# EAGLE board G888a (EAGLE 4.11)
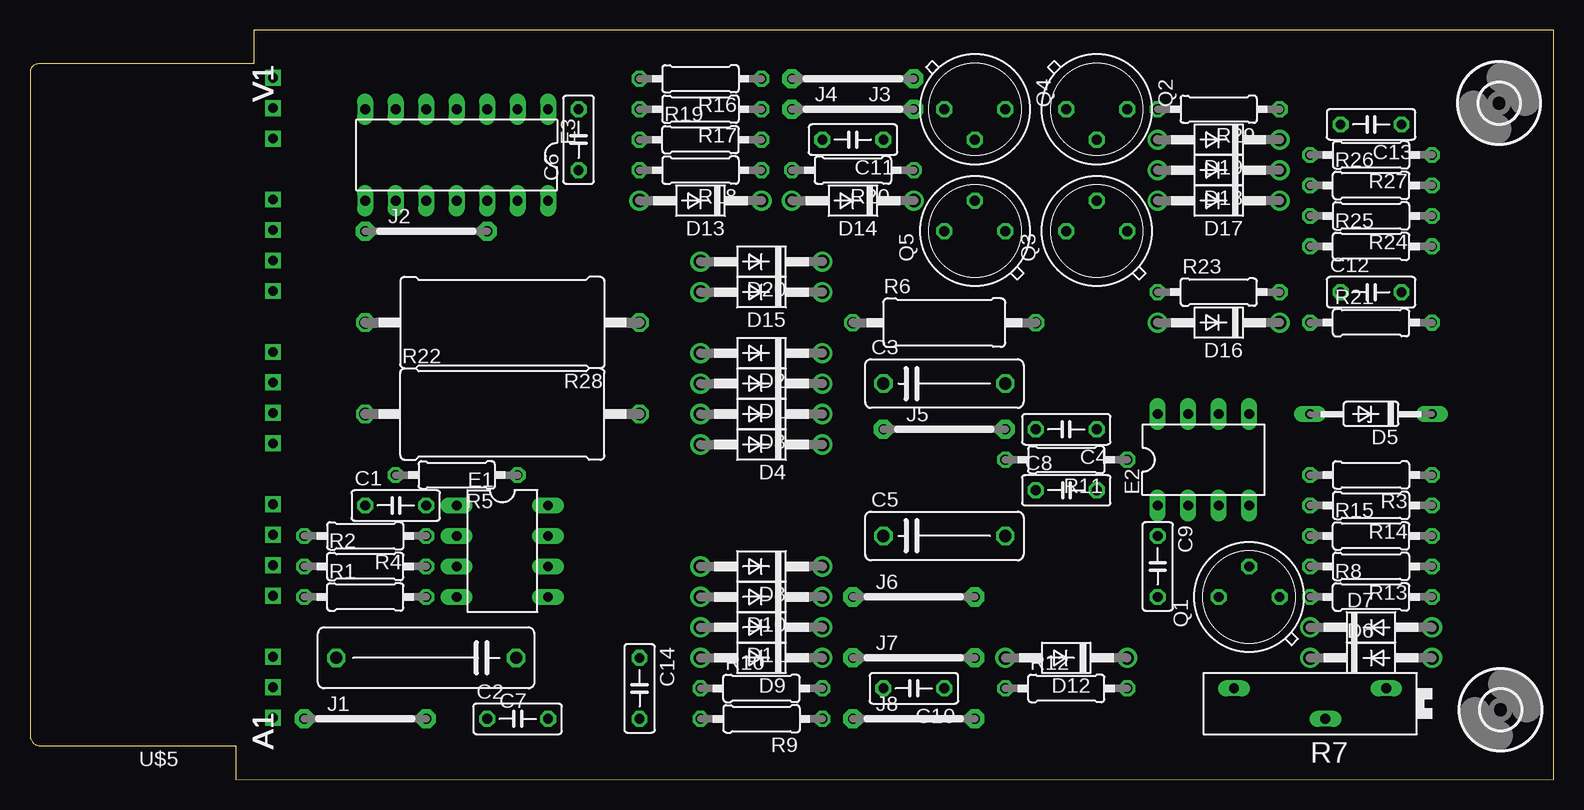
[diagram p0: board, top side]
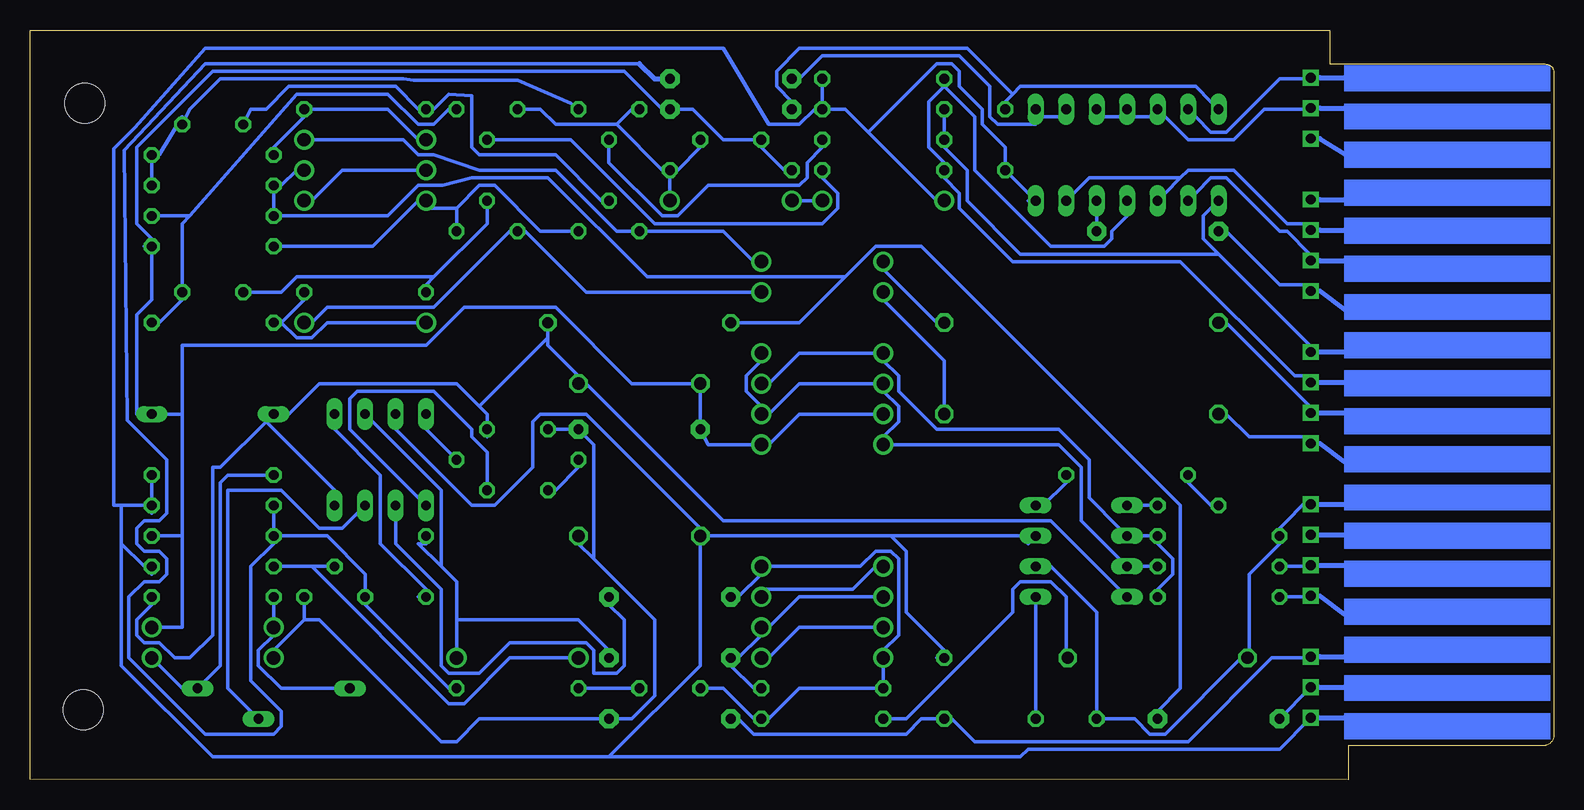
[diagram p1: board, bottom side, seen from below]

Size 126.98 x 62.48 mm. Coordinates in mm from the lower left corner, seen from the top.
Outline: 17.14,2.83 17.14,0 126.98,0.04 126.98,62.45 18.66,62.48 18.66,59.65 0.69,59.65 arc90 0,58.96 0,3.72 arc90 0.89,2.83 17.14,2.83
Copper layers (1*16): Top 0.035mm / dielectric 1.5mm / Bottom 0.035mm
Design rules "10mils": minimum track width 12mil, minimum drill 28mil, track to track 10mil, track to pad 10mil, pad to pad 10mil, via to via 10mil, smd to smd 10mil, copper to edge 40mil, drill to drill 10mil, minimum pad ring 10mil, minimum via ring 8mil, stop-mask expansion 0mil, vias tented up to drill 0mil, thermal gap 10mil

## Footprints (pad centres in the part's own frame; a part is rotated, then mirrored left to right if it is on the bottom)
C050-025X075 = drill 0.813 octagon: 1 -2.54,0; 2 2.54,0
C102-043X133 = drill 1.016 octagon: 1 -5.08,0; 2 5.08,0
C150-054X183 = drill 1.016 octagon: 1 -7.493,0; 2 7.493,0
DO41-10 = drill 1.118 round: A 5.08,0; C -5.08,0
DO35Z10 = drill 0.813 long: A 5.08,0; C -5.08,0
DIL08 = drill 0.813 long: 1 -3.81,-3.81; 2 -1.27,-3.81; 3 1.27,-3.81; 4 3.81,-3.81; 5 3.81,3.81; 6 1.27,3.81; 7 -1.27,3.81; 8 -3.81,3.81
DIL14 = drill 0.813 long: 1 -7.62,-3.81; 2 -5.08,-3.81; 3 -2.54,-3.81; 4 0,-3.81; 5 2.54,-3.81; 6 5.08,-3.81; 7 7.62,-3.81; 8 7.62,3.81; 9 5.08,3.81; 10 2.54,3.81; 11 0,3.81; 12 -2.54,3.81; 13 -5.08,3.81; 14 -7.62,3.81
10 = drill 0.813 pad 1.6 octagon: 1 -5.08,0; 2 5.08,0
TO39 = drill 0.813 octagon: 1 0,-2.54; 2 2.54,0; 3 0,2.54
0207/10 = drill 0.813 octagon: 1 -5.08,0; 2 5.08,0
0411/15 = drill 0.914 octagon: 1 -7.62,0; 2 7.62,0
PT-SPIN = drill 0.813 long: A -6.35,-1.27; E 6.35,-1.27; S -1.27,1.27
P0817/22 = drill 1.016 octagon: 1 -11.43,0; 2 11.43,0
3,3 = hole 3.3: 0,0
ONE-SIDED = drill 0.813 square: A2 20.256,5.175; B2 20.256,7.715; C2 20.256,10.255; D2 20.256,15.335; E2 20.256,17.875; F2 20.256,20.415; H2 20.256,22.955; J2 20.256,28.035; K2 20.256,30.575; L2 20.256,33.115; M2 20.256,35.655; N2 20.256,40.735; P2 20.256,43.275; R2 20.256,45.815; S2 20.256,48.355; T2 20.256,53.435; U2 20.256,55.975; V2 20.256,58.515

## Placement (x,y rotation side)
C1  .22uf  [C050-025X075]  30.48,22.86 0 top
C2  .01uf  [C050-025X075]  40.63,5.08 0 top
C3  6.8uf 35V  [C102-043X133]  76.2,33.02 0 top
C4  .01uf  [C050-025X075]  86.36,29.21 180 top
C5  6.8uf 35V  [C102-043X133]  76.2,20.32 0 top
C6  .01uf  [C050-025X075]  45.71,53.34 90 top
C7  .01uf MYLAR 10%  [C150-054X183]  33.02,10.16 180 top
C8  .22uf  [C050-025X075]  86.36,24.13 0 top
C9  .01uf  [C050-025X075]  93.98,17.78 270 top
C10  .01uf  [C050-025X075]  73.66,7.62 180 top
C11  .01uf  [C050-025X075]  68.58,53.34 180 top
C12  .1uf  [C050-025X075]  111.76,40.64 0 top
C13  .1uf  [C050-025X075]  111.76,54.61 180 top
C14  .01uf  [C050-025X075]  50.79,7.62 270 top
D1  1N3606  [DO41-10]  60.95,33.02 180 top
D2  1N3606  [DO41-10]  60.95,35.56 180 top
D3  1N3606  [DO41-10]  60.95,30.48 180 top
D4  1N3606  [DO41-10]  60.95,27.94 180 top
D5  1N753A  [DO35Z10]  111.76,30.48 180 top
D6  1N645  [DO41-10]  111.76,10.16 0 top
D7  1N645  [DO41-10]  111.76,12.7 0 top
D8  1N3606  [DO41-10]  60.95,17.78 180 top
D9  1N3606  [DO41-10]  60.95,10.16 180 top
D10  1N3606  [DO41-10]  60.95,15.24 180 top
D11  1N3606  [DO41-10]  60.95,12.7 180 top
D12  1N3606  [DO41-10]  86.36,10.16 180 top
D13  1N645  [DO41-10]  55.88,48.26 180 top
D14  1N645  [DO41-10]  68.58,48.26 180 top
D15  D670  [DO41-10]  60.95,40.64 180 top
D16  D670  [DO41-10]  99.06,38.1 180 top
D17  1N645  [DO41-10]  99.06,48.26 180 top
D18  1N645  [DO41-10]  99.06,50.8 180 top
D19  D670  [DO41-10]  99.06,53.34 180 top
D20  D670  [DO41-10]  60.95,43.18 180 top
E1  MC1709  [DIL08]  39.36,19.05 270 top
E2  MC1709  [DIL08]  97.79,26.67 0 top
E3  7400N  [DIL14]  35.55,52.07 180 top
J1  J10MM  [10]  27.94,5.08 0 top
J2  J10MM  [10]  33.02,45.72 0 top
J3  J10MM  [10]  68.58,58.42 180 top
J4  J10MM  [10]  68.58,55.88 0 top
J5  J10MM  [10]  76.2,29.21 0 top
J6  J10MM  [10]  73.66,15.24 0 top
J7  J10MM  [10]  73.66,10.16 0 top
J8  J10MM  [10]  73.66,5.08 0 top
Q1  2n3009B  [TO39]  101.59,15.24 90 top
Q2  MPS6534  [TO39]  88.9,55.88 270 top
Q3  MM1008  [TO39]  88.9,45.72 90 top
Q4  MPS6534  [TO39]  78.73,55.88 270 top
Q5  MM1008  [TO39]  78.73,45.72 90 top
R1  220  [0207/10]  27.94,15.24 0 top
R2  220  [0207/10]  27.94,17.78 0 top
R3  1K  [0207/10]  111.76,25.4 180 top
R4  22K  [0207/10]  27.94,20.32 180 top
R5  1.5K  [0207/10]  35.55,25.4 180 top
R6  330 1/2W  [0411/15]  76.2,38.1 0 top
R7  5K  [PT-SPIN]  106.68,6.35 180 top
R8  1K  [0207/10]  111.76,15.24 0 top
R9  4.7K  [0207/10]  60.95,5.08 180 top
R10  470K  [0207/10]  60.95,7.62 0 top
R11  1.5K  [0207/10]  86.36,26.67 180 top
R12  470K  [0207/10]  86.36,7.62 0 top
R13  4.7K  [0207/10]  111.76,17.78 180 top
R14  1K  [0207/10]  111.76,22.86 180 top
R15  3K  [0207/10]  111.76,20.32 0 top
R16  1K  [0207/10]  55.88,58.42 180 top
R17  1K  [0207/10]  55.88,55.88 180 top
R18  470  [0207/10]  55.88,50.8 180 top
R19  470  [0207/10]  55.88,53.34 0 top
R20  470  [0207/10]  68.58,50.8 180 top
R21  750  [0207/10]  111.76,38.1 0 top
R22  68 2W  [P0817/22]  39.36,30.48 0 top
R23  560  [0207/10]  99.06,40.64 0 top
R24  1K  [0207/10]  111.76,46.99 180 top
R25  1K  [0207/10]  111.76,44.45 0 top
R26  1K  [0207/10]  111.76,49.53 0 top
R27  750  [0207/10]  111.76,52.07 180 top
R28  68 2W  [P0817/22]  39.36,38.1 180 top
R29  560  [0207/10]  99.06,55.88 180 top
U$2  [3,3]  122.42,56.39 0 top
U$3  [3,3]  122.55,5.84 0 top
U$5  ONE-SIDED  [ONE-SIDED]  -0.01,0 0 top

## Library data of the parts
C1-C14 R1-R6 R8-R29 = rcl
D1-D20 = diode
E1 E2 = linear
E3 = 74xx-us
J1-J8 = jumper
Q1 Q3 Q5 = transistor-npn
Q2 Q4 = transistor-pnp
R7 = pot
U$2 U$3 = holes
U$5 = con-dec

## Nets
-15V: D18.C J1.2 R6.1 R24.2 R26.1
D: R1.1 U$5.D2
E: R2.1 U$5.E2
GND: C3.1 C4.2 C5.2 C6.2 C11.2 C14.2 D3.A D4.C D5.C D6.C D7.A E3.7 J4.1 J4.2 J5.1 J5.2 J8.1 J8.2 Q1.1 R15.2 R20.2 R25.2 U$5.C2
H: C2.1 C7.2 E1.6 R4.2 U$5.H2
J: R22.1 U$5.J2
K: R28.2 U$5.K2
L: E3.11 R16.2 R18.2 U$5.L2
M: E3.8 R17.2 R19.1 U$5.M2
N: J2.1 U$5.N2
N$1: C1.1 R5.2
N$2: C8.1 R11.2
N$3: D1.C D2.A E1.2 R1.2 R4.1
N$4: D1.A D2.C D3.C D4.A E1.3 R2.2
N$5: C8.2 E2.1
N$6: C1.2 E1.1
N$7: E1.8 R5.1
N$8: C2.2 E1.5
N$9: D6.A R3.2 R7.A
N$10: C10.2 D8.C D9.A E2.2 J6.1 J6.2 R9.1 R10.1
N$11: E2.3 R7.S
N$12: D7.C R7.E R8.1
N$13: E2.8 R11.1
N$14: C9.2 E2.5
N$15: C9.1 D10.A D11.C D12.C E2.6 J7.1 J7.2 R10.2
N$16: C7.1 R9.2
N$17: D9.C D11.A
N$18: D8.A D10.C
N$19: C10.1 R12.1
N$20: D12.A Q1.2 R13.2
N$21: J3.1 Q1.3 R12.2 R14.2 R15.1
N$22: D17.A Q3.1 Q5.1 R25.1
N$23: C11.1 D14.C Q2.1 Q4.1 R20.1
N$24: D13.C D14.A
N$25: Q2.2 R18.1
N$26: Q4.2 R19.2
N$27: D15.A R22.2
N$28: D16.A R21.1 R23.2
N$29: C12.2 Q2.3 R21.2 R24.1
N$30: C12.1 Q3.2 R23.1
N$31: D19.A R27.2 R29.1
N$32: C13.1 Q4.3 R26.2 R27.1
N$33: C13.2 Q5.2 R29.2
N$34: D20.A R28.1
N$35: D15.C D16.C Q3.3
N$36: D19.C D20.C Q5.3
N$37: D17.C D18.A
N$38: J1.1 U$5.B2
N$39: E3.12 J2.2
N$40: E3.1 E3.2 J3.2
P: E3.9 U$5.P2
R: E3.10 E3.13 U$5.R2
U: E3.3 E3.4 E3.5 U$5.U2
V: E3.6 U$5.V2
V+: C5.1 C6.1 C14.1 D13.A E1.7 E2.7 E3.14 R3.1 R13.1 R14.1 R16.1 R17.1 U$5.A2
V-: C3.2 C4.1 D5.A E1.4 E2.4 R6.2 R8.2

## Tracks (layer width: path | path; a pad name or v marks a point on that pad's centre or on a via)
-15V
  Bottom 0.305: 59.05,41.91 56.51,44.45 52.7,44.45 31.11,22.86 31.11,7.62 33.02,5.71 J1.2 | 59.05,41.91 62.86,38.1 67.94,38.1 R6.1 | D18.C 104.77,50.8 106.04,49.53 R26.1 106.68,48.9 106.68,47.62 R24.2 106.04,46.99 104.77,46.99 97.15,46.99 94.61,49.53 92.58,49.53 90.17,50.16 83.81,50.16 75.56,41.91 59.05,41.91
D
  Bottom 0.305: U$5.D2 20.32,15.24 22.22,15.24 R1.1
E
  Bottom 0.305: U$5.E2 20.32,17.78 22.22,17.78 R2.1
GND
  Top 0.305: J4.1 64.13,55.88 67.94,55.88 73.02,55.88 J4.2 | J8.1 69.21,5.08
  Top 0.406: 69.21,5.08 J8.2 | J5.2 J5.1
  Bottom 0.305: 81.28,20.95 C5.2 81.28,19.68 80.01,18.41 | D3.A 56.51,30.48 62.86,30.48 65.4,27.94 D4.C 66.67,27.94 70.48,27.94 J5.1 71.12,28.57 71.12,32.38 C3.1 71.75,33.02 76.83,33.02 83.18,39.37 90.8,39.37 93.98,36.2 114.3,36.2 114.3,30.48 | J8.2 78.1,5.08 | U$5.C2 20.32,10.16 23.49,10.16 30.48,3.17 48.25,3.17 50.16,5.08 C14.2 51.43,5.08 52.7,5.08 53.97,3.81 66.67,3.81 67.94,5.08 J8.1 | 78.1,5.08 76.83,5.08 74.93,6.99 74.93,13.34 80.01,18.41 | J8.2 78.1,5.08 | J8.2 79.37,5.08 89.53,5.08 91.44,3.17 92.7,3.17 102.87,13.34 104.14,13.34 | 114.3,20.32 114.3,16.51 114.3,12.7 116.2,12.7 D7.A | 45.08,57.15 45.71,56.52 C6.2 | 45.08,57.15 44.45,57.78 29.84,57.78 28.57,56.52 E3.7 | 45.08,57.15 48.89,60.96 62.86,60.96 64.77,59.05 64.77,57.78 63.49,56.52 J4.1 | 104.14,13.34 104.14,14.61 Q1.1 | 104.14,13.34 106.68,10.79 D6.C | 114.3,20.32 116.2,20.32 R15.2 | 80.01,18.41 80.01,26.04 80.01,27.94 J5.2 81.91,29.21 83.18,29.21 C4.2 | R20.2 64.13,50.8 66.04,52.7 C11.2 66.67,53.34 69.21,53.34 71.75,55.88 73.02,55.88 J4.2 | 74.29,55.88 J4.2 | 114.3,30.48 114.3,20.32 | 114.3,30.48 115.56,30.48 D5.C 118.11,30.48 118.11,38.73 116.84,40.01 116.84,43.81 R25.2 | R25.2 117.47,44.45 | 74.29,55.88 77.47,59.05 111.76,59.05 118.11,52.7 118.11,46.35 116.84,45.09 R25.2 | 74.29,55.88 J4.2
H
  Bottom 0.305: U$5.H2 20.32,23.5 22.86,20.95 R4.2 22.86,19.68 25.39,17.14 25.39,10.79 C7.2 26.03,10.16 32.38,3.81 33.65,3.81 34.92,5.08 37.46,5.08 C2.1 38.09,5.71 38.09,13.97 41.9,17.78 E1.6
J
  Bottom 0.305: U$5.J2 20.32,28.57 25.39,28.57 27.3,30.48 R22.1
K
  Bottom 0.305: U$5.K2 20.32,31.11 27.3,38.1 R28.2
L
  Bottom 0.305: U$5.L2 20.32,33.66 21.59,33.66 31.11,43.18 45.08,43.18 49.52,47.62 49.52,48.9 50.79,50.16 R18.2 50.79,51.44 52.06,52.7 52.06,56.52 50.79,57.78 | 50.79,57.78 R16.2 50.79,57.78 | 50.79,57.78 48.25,55.24 48.25,50.8 41.9,44.45 37.46,44.45 36.82,45.09 36.82,45.72 35.55,46.99 E3.11
  Bottom 0.406: R16.2 50.79,57.91
M
  Bottom 0.305: 27.94,43.81 20.32,36.2 U$5.M2 | 27.94,43.81 28.57,44.45 29.21,45.09 29.21,46.99 28.57,47.62 E3.8 | R19.1 50.79,53.98 50.79,55.24 R17.2 | 50.79,52.7 R19.1 | 50.79,52.7 48.89,50.8 48.89,48.26 44.45,43.81 27.94,43.81 | 50.79,52.7 R19.1
N
  Bottom 0.305: U$5.N2 20.32,41.27 22.86,41.27 27.3,45.72 J2.1
N$1
  Bottom 0.305: C1.1 28.57,22.86 30.48,24.77 R5.2
N$2
  Bottom 0.305: C8.1 83.18,24.13 81.28,26.04 R11.2
N$3
  Bottom 0.305: R1.2 33.02,15.88 31.75,17.14 31.75,18.41 33.02,19.68 R4.1 33.65,20.32 34.28,20.32 E1.2 36.19,20.95 38.73,23.5 38.73,26.67 41.27,29.21 51.43,29.21 54.6,32.38 54.6,33.66 55.88,34.92 D2.A 56.51,35.56 62.86,35.56 65.4,33.02 D1.C
N$4
  Bottom 0.305: R2.2 33.65,17.78 34.28,17.78 E1.3 36.19,18.41 39.36,21.59 39.36,26.04 41.27,27.94 55.24,27.94 D4.A 55.88,28.57 54.6,29.84 54.6,31.11 55.88,32.38 D1.A 56.51,33.02 62.86,33.02 65.4,30.48 D3.C 66.04,31.11 67.31,32.38 67.31,33.66 66.04,34.92 D2.C
N$5
  Bottom 0.305: E2.1 94.61,23.5 100.33,29.21 100.33,31.75 99.69,32.38 93.34,32.38 90.17,29.21 90.17,28.57 88.9,27.3 88.9,24.77 C8.2
N$6
  Bottom 0.305: C1.2 33.65,22.86 34.28,22.86 E1.1
N$7
  Bottom 0.305: R5.1 40.63,24.77 42.54,22.86 E1.8
N$8
  Bottom 0.305: C2.2 43.17,5.71 43.17,14.61 E1.5
N$9
  Bottom 0.305: D6.A 114.3,7.62 R7.A 112.39,8.26 111.12,9.53 111.12,24.77 110.48,25.4 107.31,25.4 R3.2
N$10
  Top 0.406: J6.1 J6.2
  Bottom 0.305: C10.2 70.48,7.62 69.21,7.62 66.67,5.08 R9.1 65.4,5.08 62.86,7.62 56.51,7.62 R10.1 55.88,8.26 55.88,9.53 D9.A 55.88,10.79 54.6,12.06 54.6,18.41 55.24,19.05 56.51,19.05 57.78,17.78 65.4,17.78 D8.C 66.04,17.14 67.94,15.24 J6.1 68.58,15.88 | 79.37,15.24 J6.2 78.73,14.61 77.47,13.34 77.47,9.53 78.1,8.89 80.01,8.89 80.01,10.79 80.64,11.43 86.99,11.43 89.53,8.89 92.07,8.89 92.7,9.53 92.7,15.88 96.52,19.68 96.52,21.59 E2.2
N$11
  Bottom 0.305: 108.58,5.71 R7.S 108.58,5.71 | 108.58,5.71 110.48,7.62 110.48,24.13 106.04,24.13 102.87,20.95 100.96,20.95 99.69,22.23 E2.3
N$12
  Bottom 0.305: R7.E 101.59,7.62 106.04,7.62 107.95,9.53 107.95,10.79 106.68,12.06 D7.C 106.68,13.34 106.68,14.61 R8.1
N$13
  Bottom 0.305: R11.1 93.98,29.21 E2.8
N$14
  Bottom 0.305: 94.61,15.24 C9.2 93.98,15.88 97.79,19.68 97.79,25.4 101.59,29.21 E2.5
N$15
  Top 0.305: J7.1 69.21,10.16
  Top 0.406: 69.21,10.16 J7.2
  Bottom 0.305: 91.44,13.34 91.44,16.51 92.7,17.78 | 91.44,13.34 91.44,10.79 D12.C | 93.98,19.68 C9.1 93.98,19.68 | D10.A 56.51,15.24 62.86,15.24 65.4,12.7 D11.C 66.04,12.06 67.94,10.16 J7.1 68.58,9.53 66.67,7.62 R10.2 | 91.44,13.34 81.28,13.34 78.73,10.79 J7.2 | 92.7,17.78 94.61,19.68 93.98,19.68 | 92.7,17.78 92.7,24.13 98.42,29.84 E2.6
N$16
  Bottom 0.305: R9.2 55.24,5.08 53.97,5.08 45.08,13.97 45.08,15.88 44.45,16.51 41.9,16.51 40.63,15.24 40.63,10.79 C7.1
N$17
  Bottom 0.305: D11.A 56.51,12.7 62.86,12.7 65.4,10.16 D9.C
N$18
  Bottom 0.305: D8.A 56.51,17.78 58.41,15.88 66.04,15.88 D10.C
N$19
  Bottom 0.305: C10.1 76.83,7.62 80.64,7.62 R12.1
N$20
  Bottom 0.305: 103.5,17.78 102.23,17.78 Q1.2 | 103.5,17.78 106.04,17.78 R13.2 | 103.5,17.78 92.07,6.35 90.8,6.35 86.99,10.16 81.91,10.16 D12.A
N$21
  Top 0.406: J3.1 63.49,58.42
  Bottom 0.305: R12.2 92.07,7.62 99.06,14.61 Q1.3 99.06,17.14 102.23,20.32 R15.1 | R15.1 R14.2 | R15.1 106.68,19.68 108.58,17.78 108.58,8.26 106.04,5.71 106.04,4.45 106.68,3.81 112.39,3.81 118.74,10.16 118.74,15.24 117.47,16.51 116.2,16.51 115.56,17.14 115.56,18.41 116.2,19.05 117.47,19.05 118.11,19.68 118.11,20.95 117.47,21.59 116.2,21.59 115.56,22.23 115.56,26.67 118.87,29.97 119.12,52.45 112.39,59.69 76.2,59.69
  Bottom 0.406: J3.1 74.93,58.42 76.2,59.69
N$22
  Bottom 0.305: 91.44,47.62 89.53,49.53 88.26,49.53 84.45,45.72 81.91,45.72 Q5.1 | 91.44,47.62 91.44,46.35 Q3.1 | 91.44,47.62 93.98,47.62 D17.A 94.61,48.26 98.42,44.45 106.04,44.45 R25.1
N$23
  Bottom 0.305: 73.02,48.26 D14.C 73.66,48.9 73.66,50.16 R20.1 | 78.1,54.61 83.18,54.61 84.45,55.88 Q2.1 | 78.1,54.61 76.83,55.88 Q4.1 | C11.1 71.12,52.7 73.02,50.8 R20.1 | 78.1,54.61 74.29,50.8 R20.1
N$24
  Bottom 0.305: D13.C 61.59,48.26 62.86,48.26 D14.A
N$25
  Bottom 0.305: R18.1 60.95,50.16 59.68,48.9 59.68,47.62 60.95,46.35 74.93,46.35 81.91,53.34 88.26,53.34 Q2.2
N$26
  Bottom 0.305: R19.2 60.95,52.7 62.22,51.44 62.22,50.16 62.86,49.53 70.48,49.53 73.02,46.99 74.29,46.99 78.73,51.44 78.73,52.7 Q4.2
N$27
  Bottom 0.305: R22.2 50.79,31.11 50.79,34.92 55.88,40.01 D15.A
N$28
  Bottom 0.305: 104.14,40.01 R23.2 104.14,40.01 | D16.A 94.61,38.1 102.23,38.1 103.5,36.83 104.77,36.83 106.04,38.1 | 106.04,38.1 104.14,40.01 | 106.04,38.1 R21.1 106.04,38.1
N$29
  Bottom 0.305: 113.66,46.99 104.77,57.15 97.15,57.15 94.61,54.61 93.34,54.61 92.07,55.88 Q2.3 | 113.66,46.99 114.3,46.35 114.3,41.27 C12.2 114.3,40.01 116.2,38.1 R21.2 | 113.66,46.99 116.2,46.99 R24.1
N$30
  Bottom 0.305: 93.34,41.91 88.9,46.35 88.9,47.62 Q3.2 | 93.34,41.91 93.98,41.27 R23.1 | 93.34,41.91 104.77,41.91 106.04,40.64 108.58,40.64 C12.1
N$31
  Bottom 0.305: 93.98,53.98 D19.A 94.61,53.34 97.15,55.88 103.5,55.88 | 103.5,55.88 R29.1 | 103.5,55.88 R29.1 | R27.2 106.68,52.7 104.14,55.24 R29.1
N$32
  Bottom 0.305: Q4.3 81.91,56.39 86.36,58.29 94.99,58.29 95.88,58.42 111.12,58.42 111.76,57.78 113.66,55.88 C13.1 114.3,55.24 116.2,52.07 R27.1 116.84,51.44 116.84,50.16 R26.2
N$33
  Bottom 0.305: Q5.2 79.37,48.26 83.18,52.07 89.53,52.07 90.17,52.7 90.17,57.02 92.07,57.15 93.34,55.88 R29.2 94.61,55.88 96.52,57.78 105.41,57.78 107.31,55.88 108.58,55.88 C13.2
N$34
  Bottom 0.305: R28.1 51.43,38.1 55.88,42.55 D20.A
N$35
  Bottom 0.305: D15.C 66.67,40.64 80.64,40.64 85.72,45.72 Q3.3 86.99,45.72 93.34,39.37 102.23,39.37 103.5,38.1 D16.C
N$36
  Bottom 0.305: D20.C 66.67,43.18 69.21,45.72 75.56,45.72 Q5.3 76.83,45.72 78.1,45.72 83.18,50.8 88.26,50.8 89.53,50.8 93.34,52.07 94.61,52.07 95.88,53.34 103.5,53.34 D19.C
N$37
  Bottom 0.305: D18.A 94.61,50.8 100.96,50.8 103.5,48.26 D17.C
N$38
  Bottom 0.305: J1.1 20.32,7.62 U$5.B2
N$39
  Bottom 0.305: E3.12 38.09,46.99 38.09,46.35 J2.2
N$40
  Bottom 0.305: E3.2 41.27,55.24 42.54,55.24 E3.1 43.17,54.61 46.35,54.61 46.98,55.24 46.98,56.52 46.98,57.78 49.52,60.33 60.95,60.33 62.86,58.42 | 62.86,58.42 J3.2 62.86,58.42
P
  Bottom 0.305: U$5.P2 20.32,43.81 22.22,45.72 22.86,45.72 27.3,50.16 28.57,50.16 29.84,48.9 E3.9
R
  Bottom 0.305: 31.11,50.16 32.38,48.9 E3.10 | 31.11,50.16 30.48,50.8 26.67,50.8 22.22,46.35 20.32,46.35 U$5.R2 | 31.11,50.16 38.73,50.16 40,48.9 E3.13
U
  Bottom 0.305: E3.3 37.46,55.24 36.19,55.24 E3.4 34.92,55.24 33.65,55.24 E3.5 32.38,55.24 30.48,53.34 26.67,53.34 24.12,55.88 20.32,55.88 U$5.U2
V
  Bottom 0.305: U$5.V2 20.32,58.42 22.86,58.42 27.3,53.98 28.57,53.98 29.84,55.24 E3.6
V+
  Bottom 0.305: R17.1 R16.1 | 50.16,48.26 D13.A 51.43,48.26 57.14,53.98 | 43.81,48.26 E3.14 C6.1 45.71,52.7 47.62,54.61 47.62,55.88 49.52,57.78 49.52,59.05 50.16,59.69 51.43,59.69 57.14,53.98 | 57.14,53.98 59.05,55.88 R17.1 | 51.43,10.16 C14.1 50.79,10.79 53.97,13.97 53.97,19.05 55.24,20.32 | 43.81,19.68 E1.7 55.24,20.32 | 116.84,17.14 R13.1 117.47,17.78 119.38,19.68 | C5.1 55.24,20.32 | U$5.A2 20.32,5.08 22.86,2.54 43.81,2.54 44.45,1.91 78.73,1.91 | R17.1 61.59,55.88 62.86,54.61 65.4,54.61 69.21,60.96 112.39,60.96 118.23,54.36 120.01,52.58 120.01,22.86 119.38,22.86 | 119.38,22.86 R14.1 | R14.1 116.84,22.23 | R14.1 R3.1 | 119.38,19.68 119.38,22.86 | 119.38,10.16 119.38,19.68 | 119.38,10.16 119.38,10.03 | 78.73,1.91 111.76,1.91 119.38,9.53 119.38,10.16 | 78.73,1.91 71.12,9.53 C5.1 | E2.7 96.52,29.21 90.17,22.86 88.26,22.86 85.09,26.04 85.09,29.84 84.45,30.48 80.64,30.48 71.12,20.95 C5.1
V-
  Bottom 0.305: E1.4 36.19,15.88 41.9,21.59 69.21,21.59 80.64,33.02 C3.2 81.28,33.66 81.91,34.29 83.81,36.2 83.81,36.83 | R8.2 116.84,14.61 118.11,13.34 118.11,12.06 117.47,11.43 116.2,11.43 114.93,10.16 113.66,10.16 111.76,12.06 111.76,26.04 111.12,26.04 107.31,29.84 | 107.31,29.84 101.59,24.13 E2.4 | D5.A 107.31,29.84 | D5.A 107.31,29.84 | D5.A 105.41,30.48 102.87,33.02 91.44,33.02 89.53,31.11 | C4.1 88.9,28.57 C4.1 | C4.1 88.9,30.48 89.53,31.11 | 83.81,36.83 83.81,37.47 R6.2 | 83.81,36.83 89.53,31.11

## Text on the board
tNames: V1 | V1 | V1 | V1 | V1 | V1 | V1 | V1 | V1 | V1 | V1 | V1 | V1 | V1 | V1 | V1 | V1 | V1 | V1 | V1 | V1 | V1 | V1 | V1 | V1 | V1 | V1 | V1 | V1 | V1 | V1 | V1 | A1 | A1 | A1 | A1 | A1 | A1 | A1 | A1 | A1 | A1 | A1 | A1 | A1 | A1 | A1 | A1 | A1 | A1 | A1 | A1 | A1 | A1 | A1 | A1 | A1 | A1 | A1 | A1 | A1 | A1 | A1 | A1